# Altium PCB Kapasitor Kart v1.0.PcbDoc
Units mm, origin at the board's own origin, x right, y up, seen from the top; angles counter-clockwise.
Board outline 70 x 50 mm, 2 copper layers (Top Layer, Bottom Layer), stack 1.571 mm thick; 10 components, 2 nets, 44 pads, 46 vias.
Unrouted connection lines stored in the file: 1.
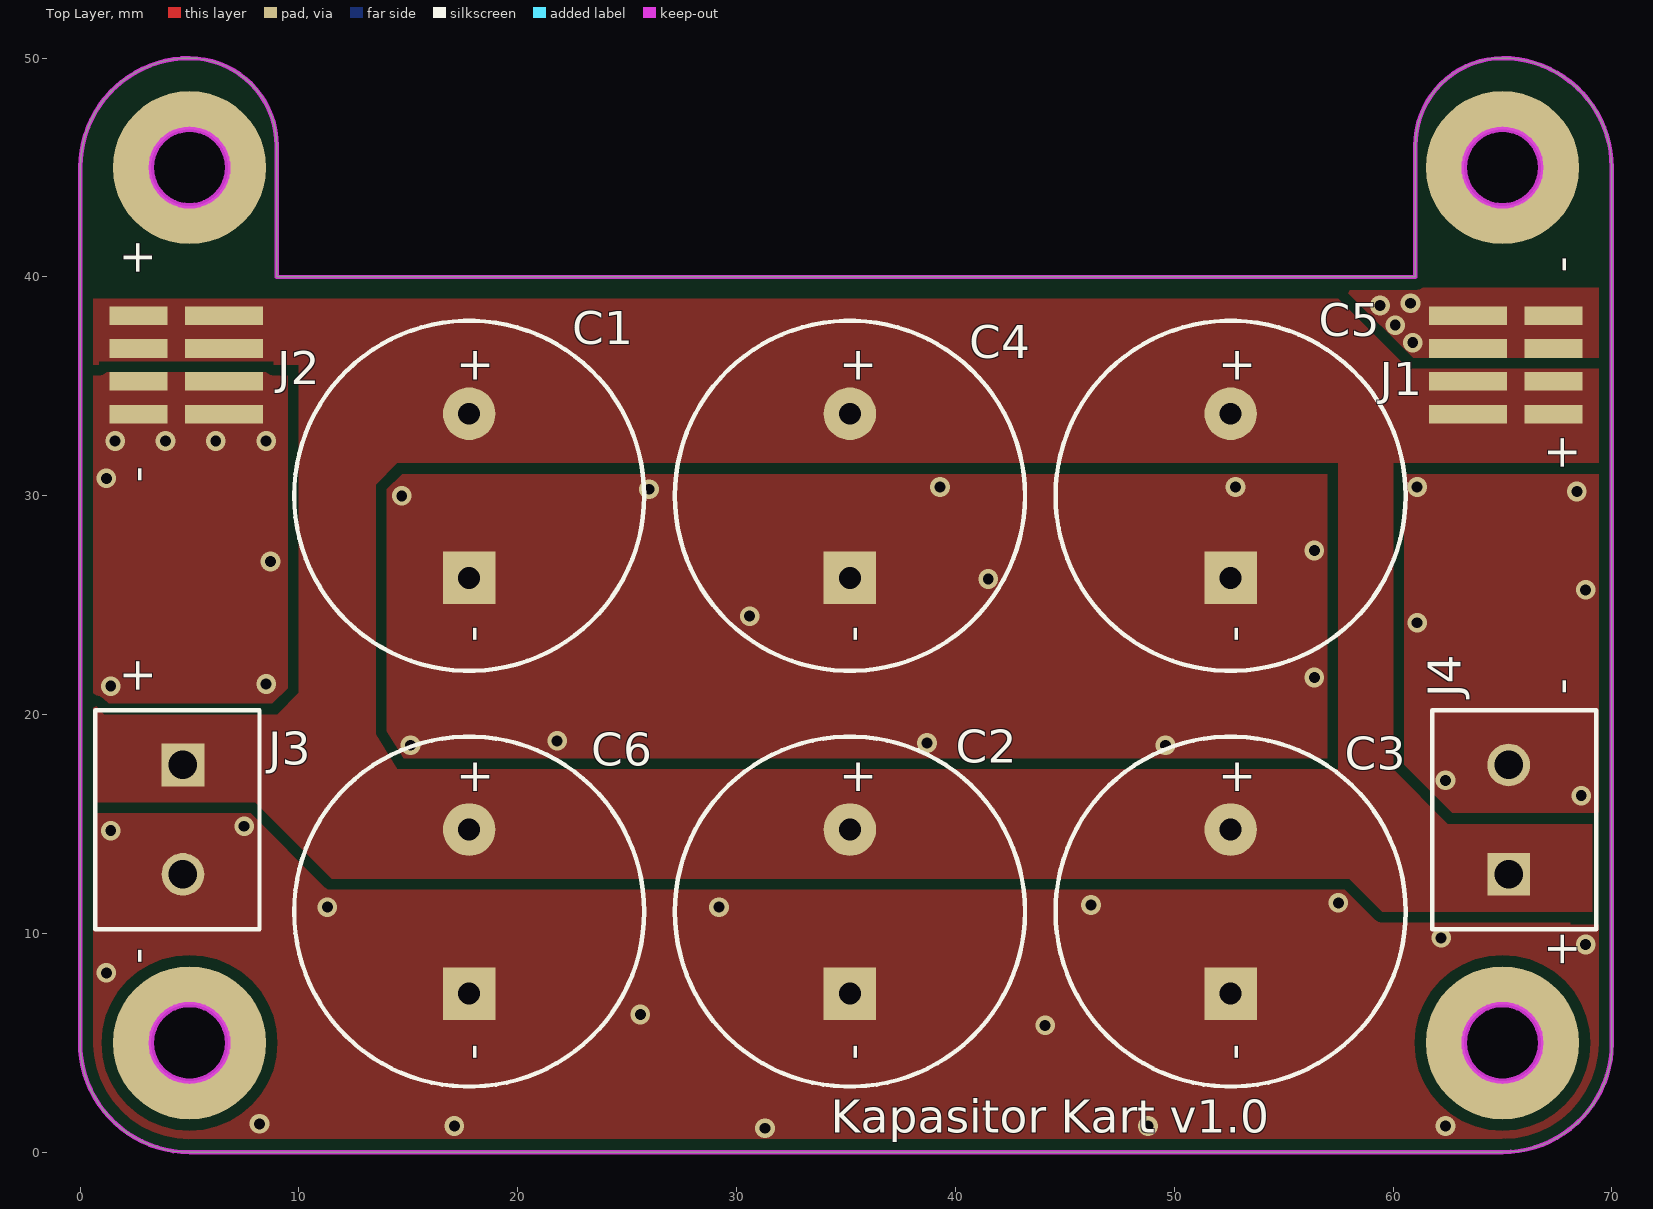
[diagram p0: Top Layer view]
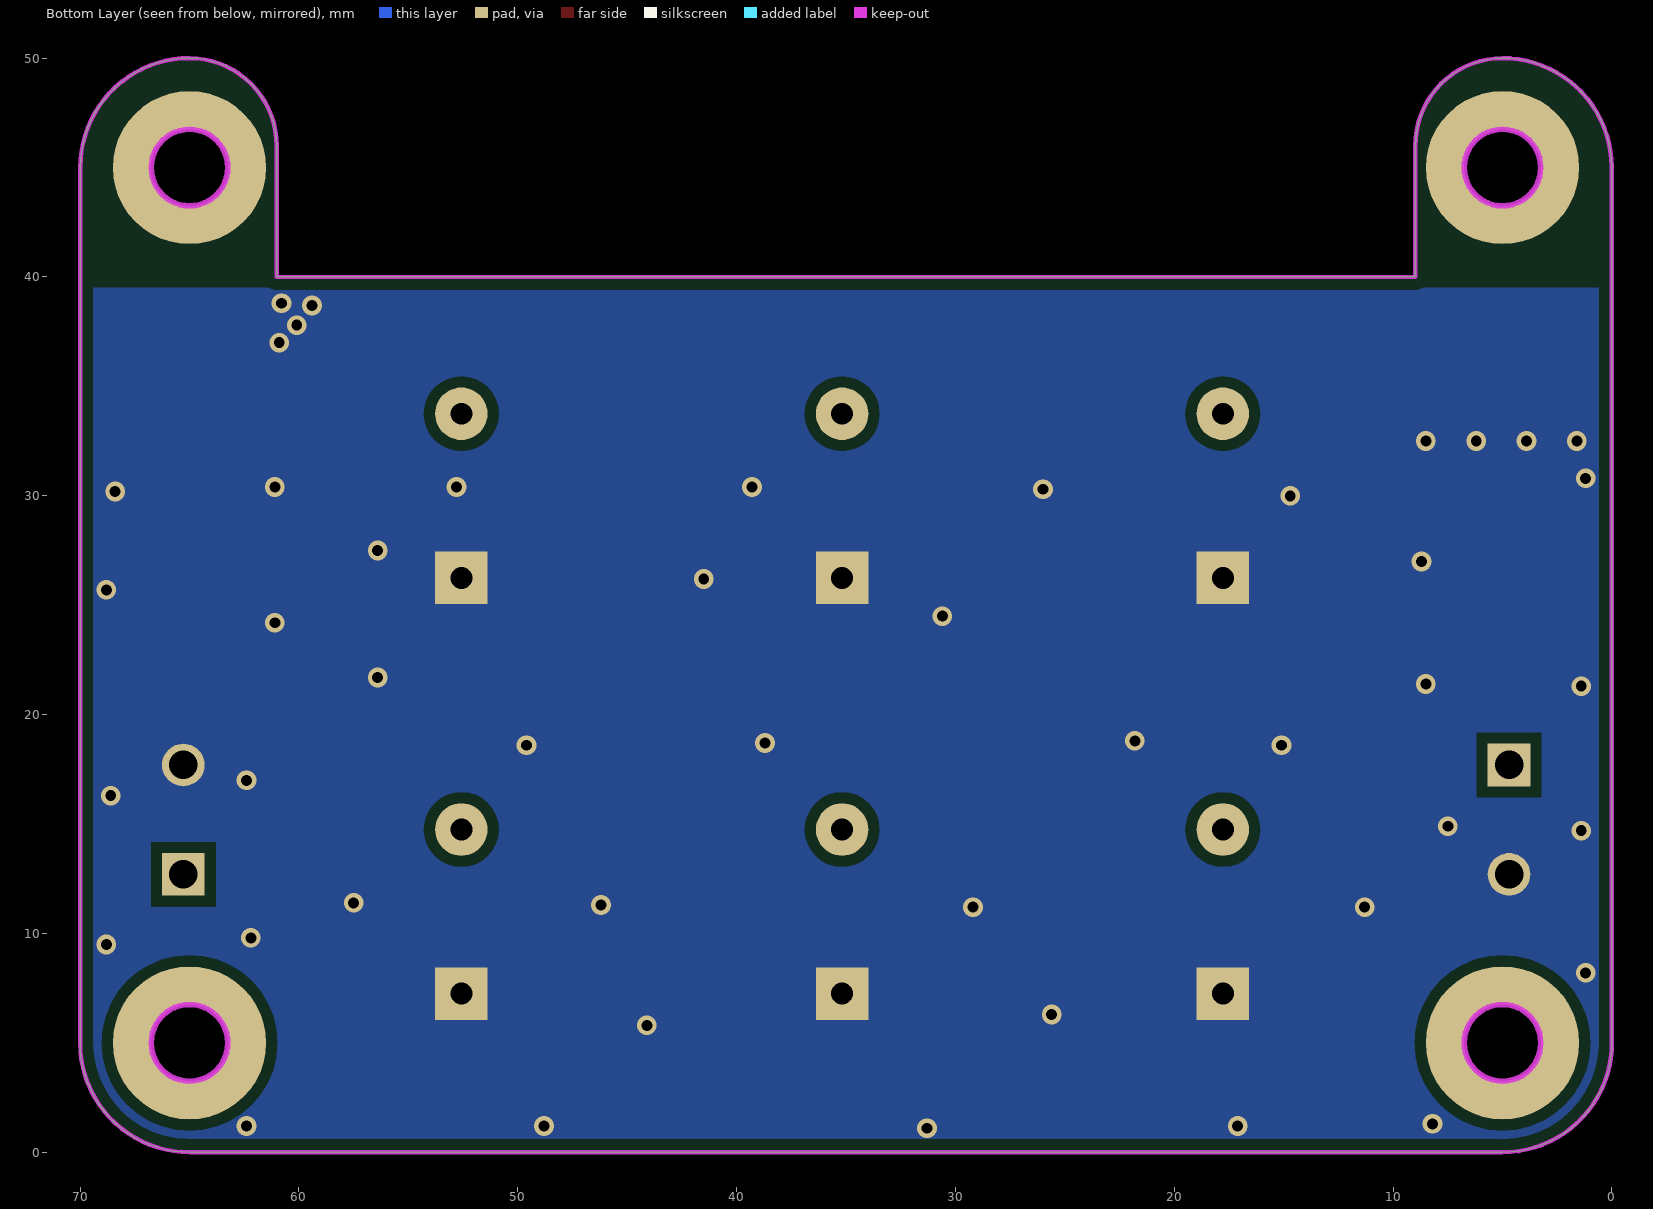
[diagram p1: Bottom Layer view, seen from below]
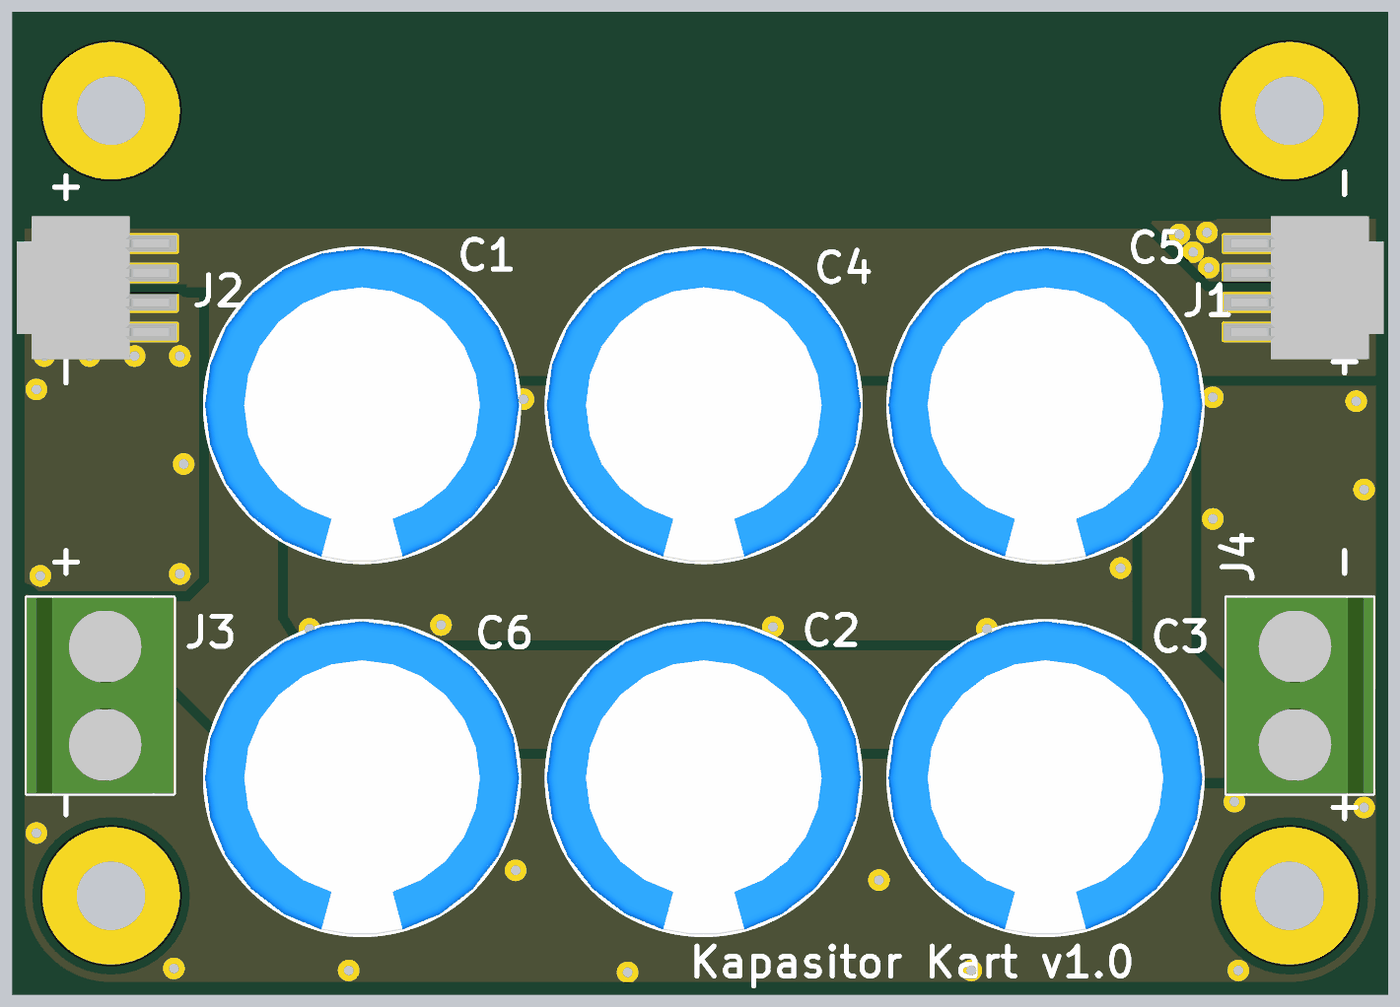
[diagram p2: 3D render of the assembled board from above, using the file's embedded part models]

## Layer stack, top to bottom
Top Solder: solder mask 0.0102, Solder Resist, Dk 3.5
Top Layer: signal copper 0.0356
Dielectric 1: dielectric 1.5, FR-4, Dk 4.8
Bottom Layer: signal copper 0.0356
Bottom Solder: solder mask 0.0102, Solder Resist, Dk 3.5

## Board outline
0,5.029 0,45.034 0.012,45.034 cw(c5.004,45.009) 5.004,50.001 cw(c4.983,46.001) 8.983,46.001 8.983,40 61.019,40 61.019,46.002 cw(c65.019,46.002) 64.999,50.002 cw(c64.999,45.009) 69.991,45.009 70,45.009 70,4.978 cw(c64.999,5.004) 64.999,0.002 64.999,0 5.004,0 cw(c5.004,5.004)

## Design rules (kind name [scope] priority, off if disabled: settings)
Clearance "Bottom Pour/Keeopout" [InNamedPolygon('Bottom Layer/GND') vs OnLayer('Keep-Out Layer')] p1: gap=0.5 ignorepadtopadclearanceinfootprint=FALSE
Clearance "Top Pour/Keepout" [InNamedPolygon('Top Layer/GND') vs OnLayer('Keep-Out Layer')] p2: gap=0.5 ignorepadtopadclearanceinfootprint=FALSE
Clearance [All] p3: gap=0.5 ignorepadtopadclearanceinfootprint=FALSE
Height [All] p1: minheight=0 maxheight=35 prefheight=12.7
PlaneConnect [All] p1: planeconnectstyle=Direct reliefexpansion=0.508 reliefentries=4 reliefconductorwidth=0.254 reliefairgap=0.254
PolygonConnect [All] p1: connectstyle=Direct reliefconductorwidth=0.254 reliefentries=4 polygonreliefangle="90 Angle" airgapwidth=0.254
RoutingVias [All] p1: holewidth=0.5 width=0.9 viastyle="Through Hole" minholewidth=0.5 minwidth=0.9 maxholewidth=0.5 maxwidth=0.9
SolderMaskExpansion [All] p1: expansion=0.102
Width [All] p1: maxlimit=2.032 minlimit=0.254 preferedwidth=0.508
28 further rules are at their usual default settings.

## Classes and differential pairs
component class "Kapasitor Kart v1.0": J1 J2 J3 J4

## Components (designator, comment, footprint, x,y, rotation, side; value= is the part's Value field where it differs from the comment)
C1 "3300uF" TH/C/7.50MM 17.78,30 r270 top
C2 "3300uF" TH/C/7.50MM 35.179,11 r270 top
C3 "3300uF" TH/C/7.50MM 52.578,11 r270 top
C4 "3300uF" TH/C/7.50MM 35.179,30 r270 top
C5 "3300uF" TH/C/7.50MM 52.578,30 r270 top
C6 "3300uF" TH/C/7.50MM 17.78,11 r270 top
J1 "4POS Molex Con" 87438-0443 63.421,38.231 r0 top locked
J2 "4POS Molex Con" 87438-0443 6.579,33.731 r180 top locked
J3 "691137710002" 691137710002 4.449,15.2 r270 top
J4 "691137710002" 691137710002 65.532,15.2 r90 top

## Footprints (in the part's own frame and the unit in brackets; to place one, negate y for a bottom-side part, rotate by r counter-clockwise, add the part's x,y. Pads: shape width x height; smd on the part's side, far side on the other; paste and mask are expansions set on the pad)
87438-0443 [mm] "87438-0443"
  rect 0.8x0.85 on Top Overlay: 0(2.2,-4.5) 0(2.2,-3) 0(2.2,-1.5) 0(2.2,0)
  rect 3.55x0.85 smd: 1(0,-4.5) 2(0,-3) 3(0,-1.5) 4(0,0)
  rect 2.65x0.85 smd: 1(3.9,-4.5) 2(3.9,-3) 3(3.9,-1.5) 4(3.9,0)
  body extent -1.38,-5.9 6.38,1.4, height 4.52
691137710002 [mm] "Horizontal Cable Entry with Pressure Clamp, pitch 5mm, 02p"
  rect 1.95x1.95 hole 1.3: 1(-2.5,0.25)
  round 1.95 hole 1.3: 2(2.5,0.25)
  silkscreen extent -5,-3.75 5,3.75, body extent -5,-3.75 5,3.75, height 11.6
TH/C/7.50MM [mm] "7.50mm Lead Space,18mm Dia TH Cap"
  round 2.4 hole 1: 1(-3.75,0)
  rect 2.4x2.4 hole 1: 2(3.75,0)
  silkscreen extent -8,-8 8,8, body extent -8,-8 8,8, height 25

## Part data
C1 C2 C3 C4 C5 C6: library part AlumCap, "UVR1V332MHD", Volt=35V, ComponentLink1Description="Digikey Link", ComponentLink1URL=https://www.digikey.com/en/products/detail/nichicon/UVR1V332MHD/588828, Digikey Link=https://www.digikey.com/en/products/detail/nichicon/UVR1V332MHD/588828, Digikey No=493-1087-ND, Mfr No=UVR1V332MHD
J1 J2: library part 87438-0443, "4 CKT 1.5mm HDR. Rt.-Angle SMT", ComponentLink1Description="Mouser Link", ComponentLink1URL=https://www.mouser.com.tr/ProductDetail/Molex/87438-0443?qs=IOh0O5QtZ911kd24EQ6lAA==, Mfr No=87438-0443, Mouser No=538-87438-0443
J3 J4: "2 Position Wire to Board Terminal Block Horizontal with Board 0.197\" (5.00mm) Through Hole", ComponentLink1Description="Digikey Link", ComponentLink1URL=https://www.digikey.com/en/products/detail/w%C3%BCrth-elektronik/691137710002/6644051, Digikey Link=https://www.digikey.com/en/products/detail/w%C3%BCrth-elektronik/691137710002/6644051, Digikey No=732-10955-ND, Mfr No=691137710002

## Free pads (board coordinates)
  round 7 hole 3.5: 1(5,45) 2(65,45) 3(5,5) 4(65,5)

## Via types
v1: diameter 0.9, hole 0.5, Top Layer to Bottom Layer, 46 vias

## Nets (pads, with @x,y where several pads share a name; then routed paths per layer and width w, separated by ;. In a path a pad name is that pad's centre, name@x,y a point inside that pad or via, vN(x,y) a via of type N, cw(c..) or ccw(c..) an arc to the next point about the centre after c; other vN are vias at no path point)
GND: C1.2 C2.2 C3.2 C4.2 C5.2 C6.2 J1.3 J1.4 J2.3 J2.4 J3.2 J4.2
  other v1: 31.3,1.1 17.1,1.2 48.8,1.2 62.4,1.2 8.2,1.3 44.1,5.8 25.6,6.3 1.2,8.2 68.8,9.5 62.2,9.8 11.3,11.2 29.2,11.2 46.2,11.3 57.5,11.4 1.4,14.7 7.5,14.9 68.6,16.3 62.4,17 15.1,18.6 49.6,18.6 38.7,18.7 21.8,18.8 1.4,21.3 8.5,21.4 56.4,21.7 61.1,24.2 30.6,24.5 68.8,25.7 41.5,26.2 8.7,27 56.4,27.5 14.7,30 68.4,30.2 26,30.3 39.3,30.4 52.8,30.4 61.1,30.4 1.2,30.8 1.6,32.5 3.9,32.5 6.2,32.5 8.5,32.5 60.9,37 60.1,37.8 59.4,38.7 60.8,38.8
Vcc: C1.1 C2.1 C3.1 C4.1 C5.1 C6.1 J1.1 J1.2 J2.1 J2.2 J3.1 J4.1
pads on no net: J1.0 J2.0

## Polygon pours and split planes (outlines as drawn)
GND on Top Layer "Top Layer/GND" (solid, remove dead copper, pour order 33): 0,0 0,39.5 69.977,39.5 69.977,0
Vcc on Top Layer "Vcc2" (solid, pour order 25): 60,17.5 60,31.5 57.5,31.5 57.5,17.5
Vcc on Top Layer "Vcc" (solid, remove dead copper, pour order 17): 0.5,39 57.5,39 60.7,35.8 69.5,35.8 69.5,31.5 14.5,31.5 13.5,30.5 13.5,19.1 14.5,17.5 15,17.5 60,17.5 62.5,15 69.1,15 69.1,11 59.5,11 58,12.5 11.5,12.5 8,16 0.6,16 0.6,20.5 1.1,20 9,20 10,21 10,36 0.5,36
GND on Bottom Layer "Bottom Layer/GND" (solid, remove dead copper, pour order 29): 0,0 0,39.5 69.977,39.5 69.977,0

## Keep-outs
Keep-Out Layer:
  circle w0.254: c5,45 r1.75
  circle w0.254: c65,5 r1.75
  circle w0.254: c65,45 r1.75
  circle w0.254: c5,5 r1.75
  lines w0.2: 0,45.034 0,5.029 ccw(c5.004,5.004) 5.004,0 64.999,0 ; 0.012,45.034 cw(c5.004,45.009) 5.004,50.001 cw(c4.983,46.001) 8.983,46.001 8.983,40 61.019,40 61.019,46.002 cw(c65.019,46.002) 64.999,50.002 ; 64.999,0.002 ccw(c64.999,5.004) 70,4.978 70,45.009 ; 64.999,50.002 cw(c64.999,45.009) 69.991,45.009

## Other copper
Top Layer:
  pour cut-out: 68.1,10.5 69.45,10.5 69.45,10.4 68.1,10.4

## Silkscreen, mask and mechanical layers (free items; w line width, h text height)
Top Overlay:
  text "-" at 68.4,40.2 h1.52 r90
  text "+" at 3.3,40 h1.52 r90
  text "+" at 17.2,35.3 h1.52
  text "+" at 34.7,35.3 h1.52
  text "+" at 52,35.3 h1.52
  text "+" at 68.4,31.1 h1.52 r90
  text "-" at 3.3,30.6 h1.52 r90
  text "-" at 18.6,23.3 h1.52 r90
  text "-" at 36,23.3 h1.52 r90
  text "-" at 53.4,23.3 h1.52 r90
  text "+" at 3.3,20.9 h1.52 r90
  text "-" at 68.4,20.9 h1.52 r90
  text "+" at 17.2,16.5 h1.52
  text "+" at 34.7,16.5 h1.52
  text "+" at 52,16.5 h1.52
  text "-" at 3.3,8.6 h1.52 r90
  text "+" at 68.4,8.4 h1.52 r90
  text "-" at 18.6,4.2 h1.52 r90
  text "-" at 36,4.2 h1.52 r90
  text "-" at 53.4,4.2 h1.52 r90
  text "Kapasitor Kart v1.0" at 34.3,0.9 h1.52